# Altium PCB ACSR-RC-V2.0.PcbDoc (part 1 of 3)
Units mm, origin at the board's own origin, x right, y up, seen from the top; angles counter-clockwise.
Board outline 93 x 128 mm, 2 copper layers (Top Layer, Bottom Layer); 207 components, 178 nets, 884 pads, 664 vias.
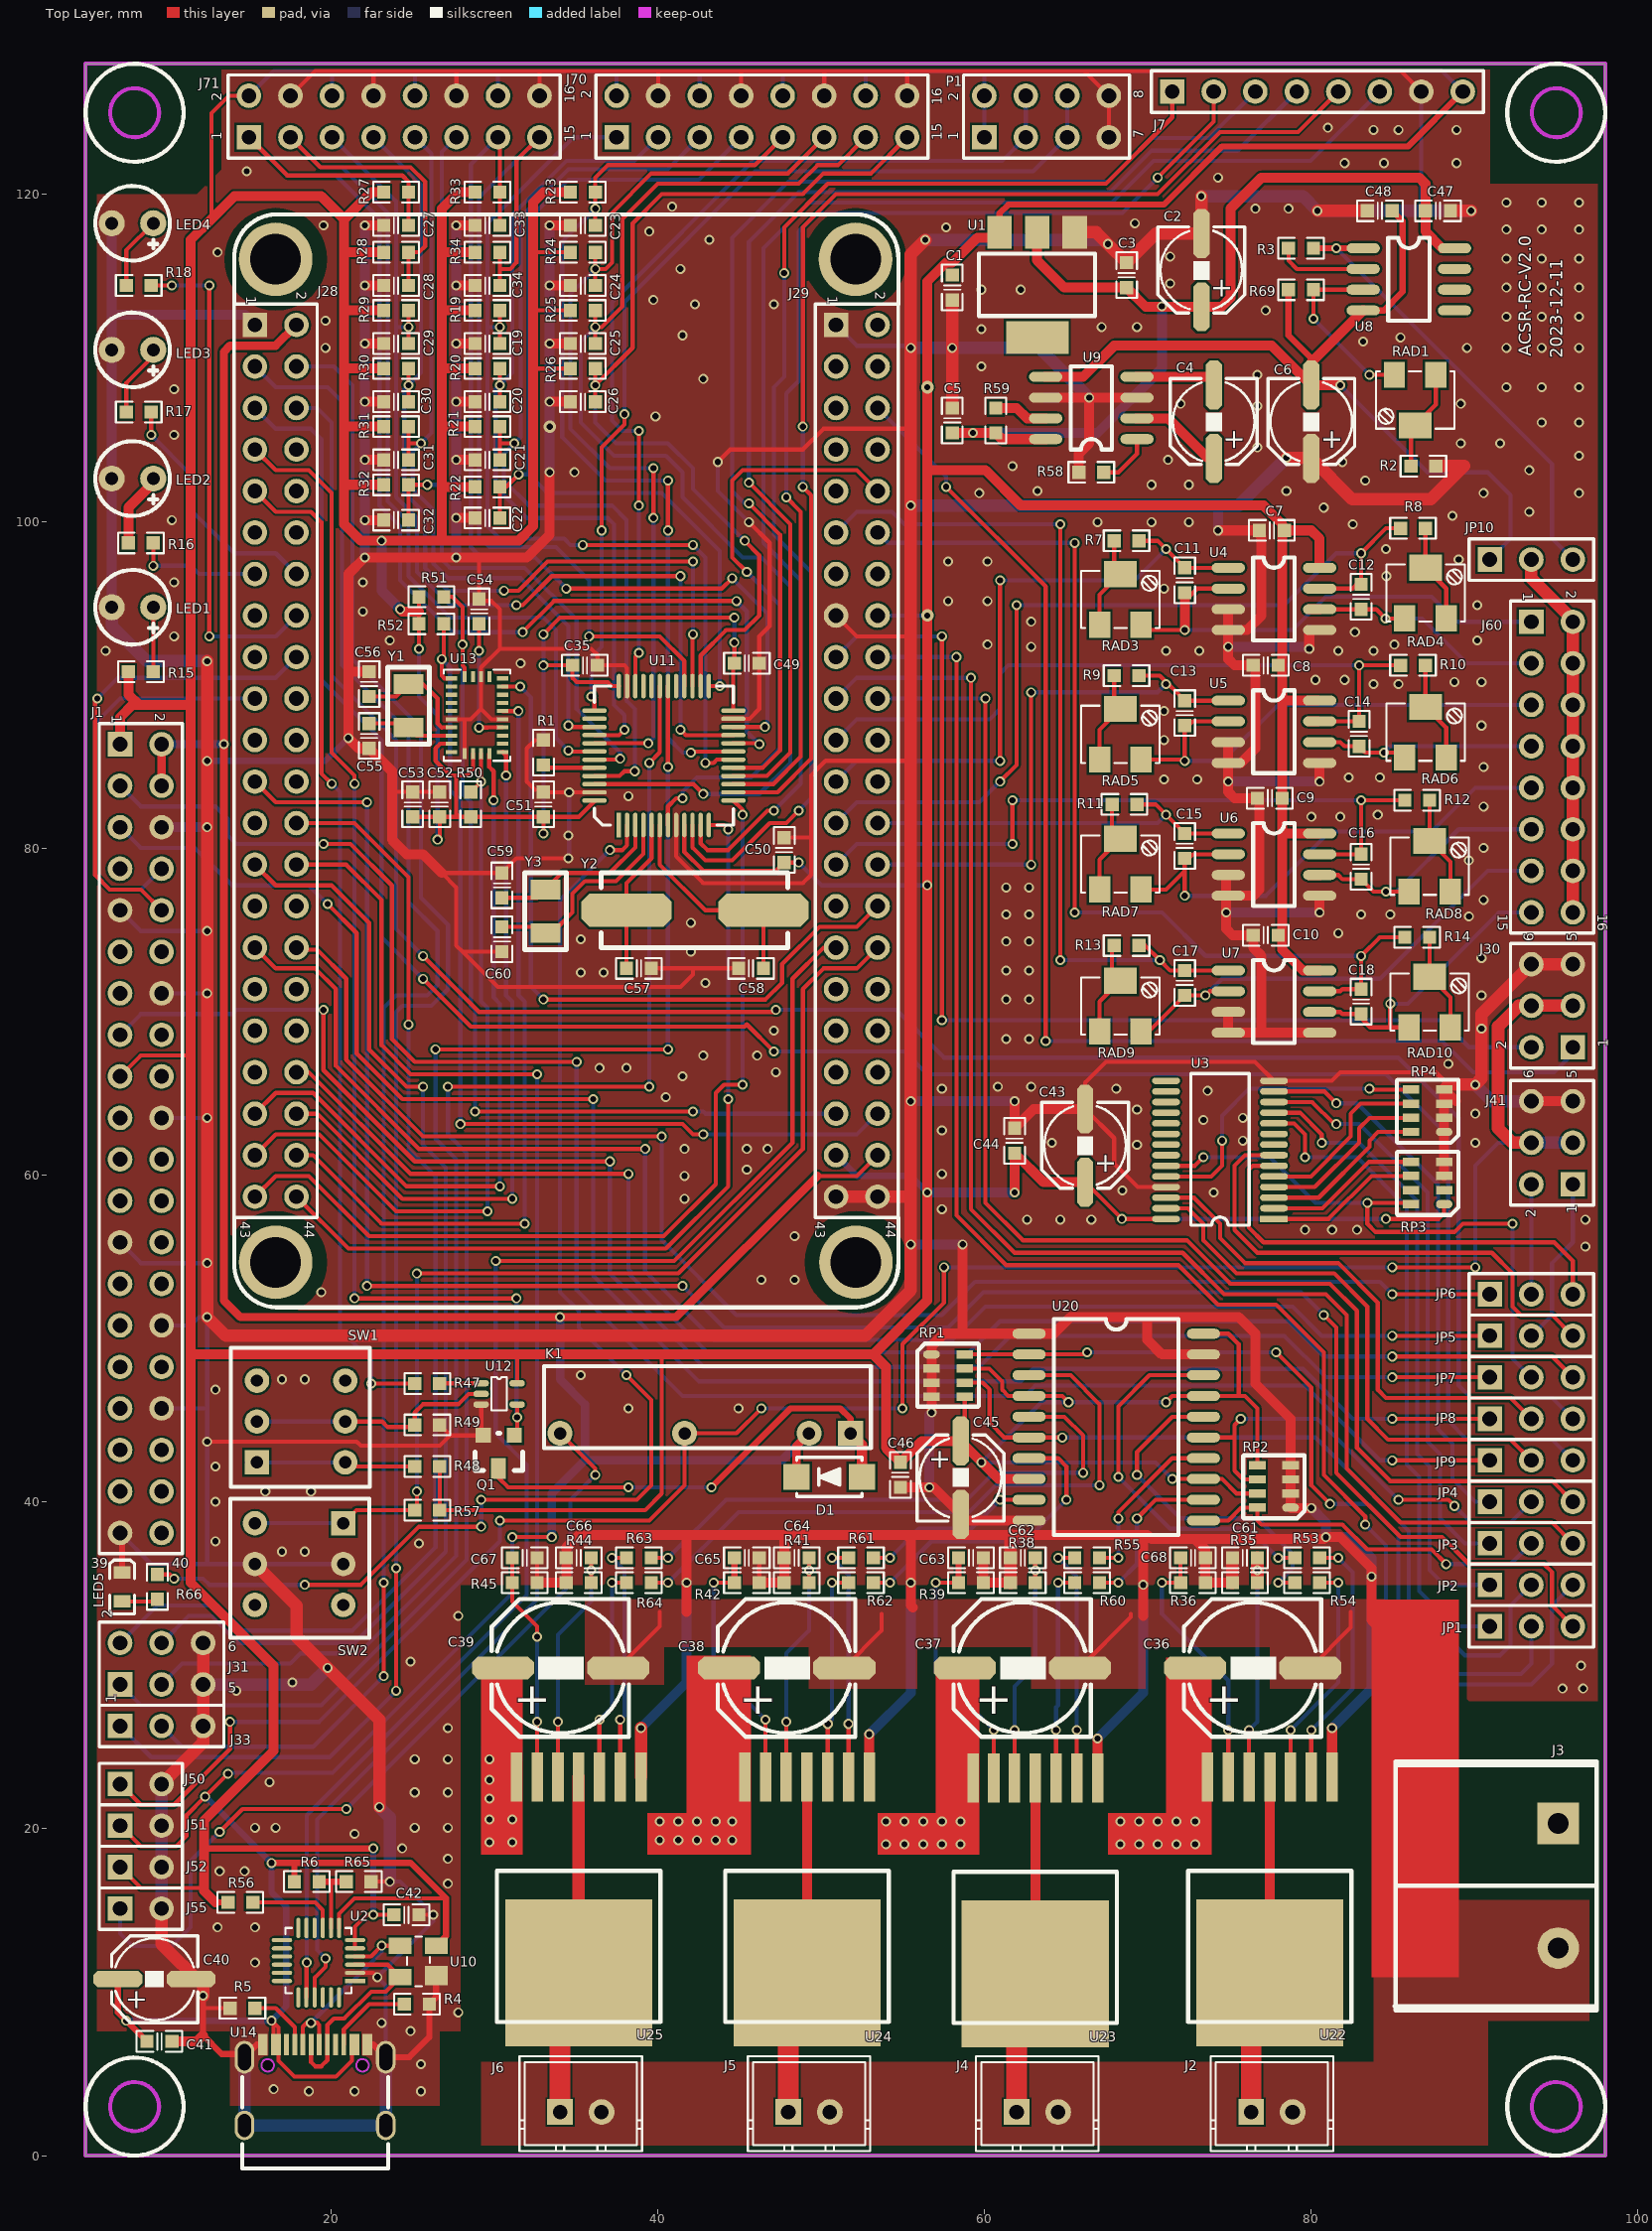
[diagram p0: Top Layer view]
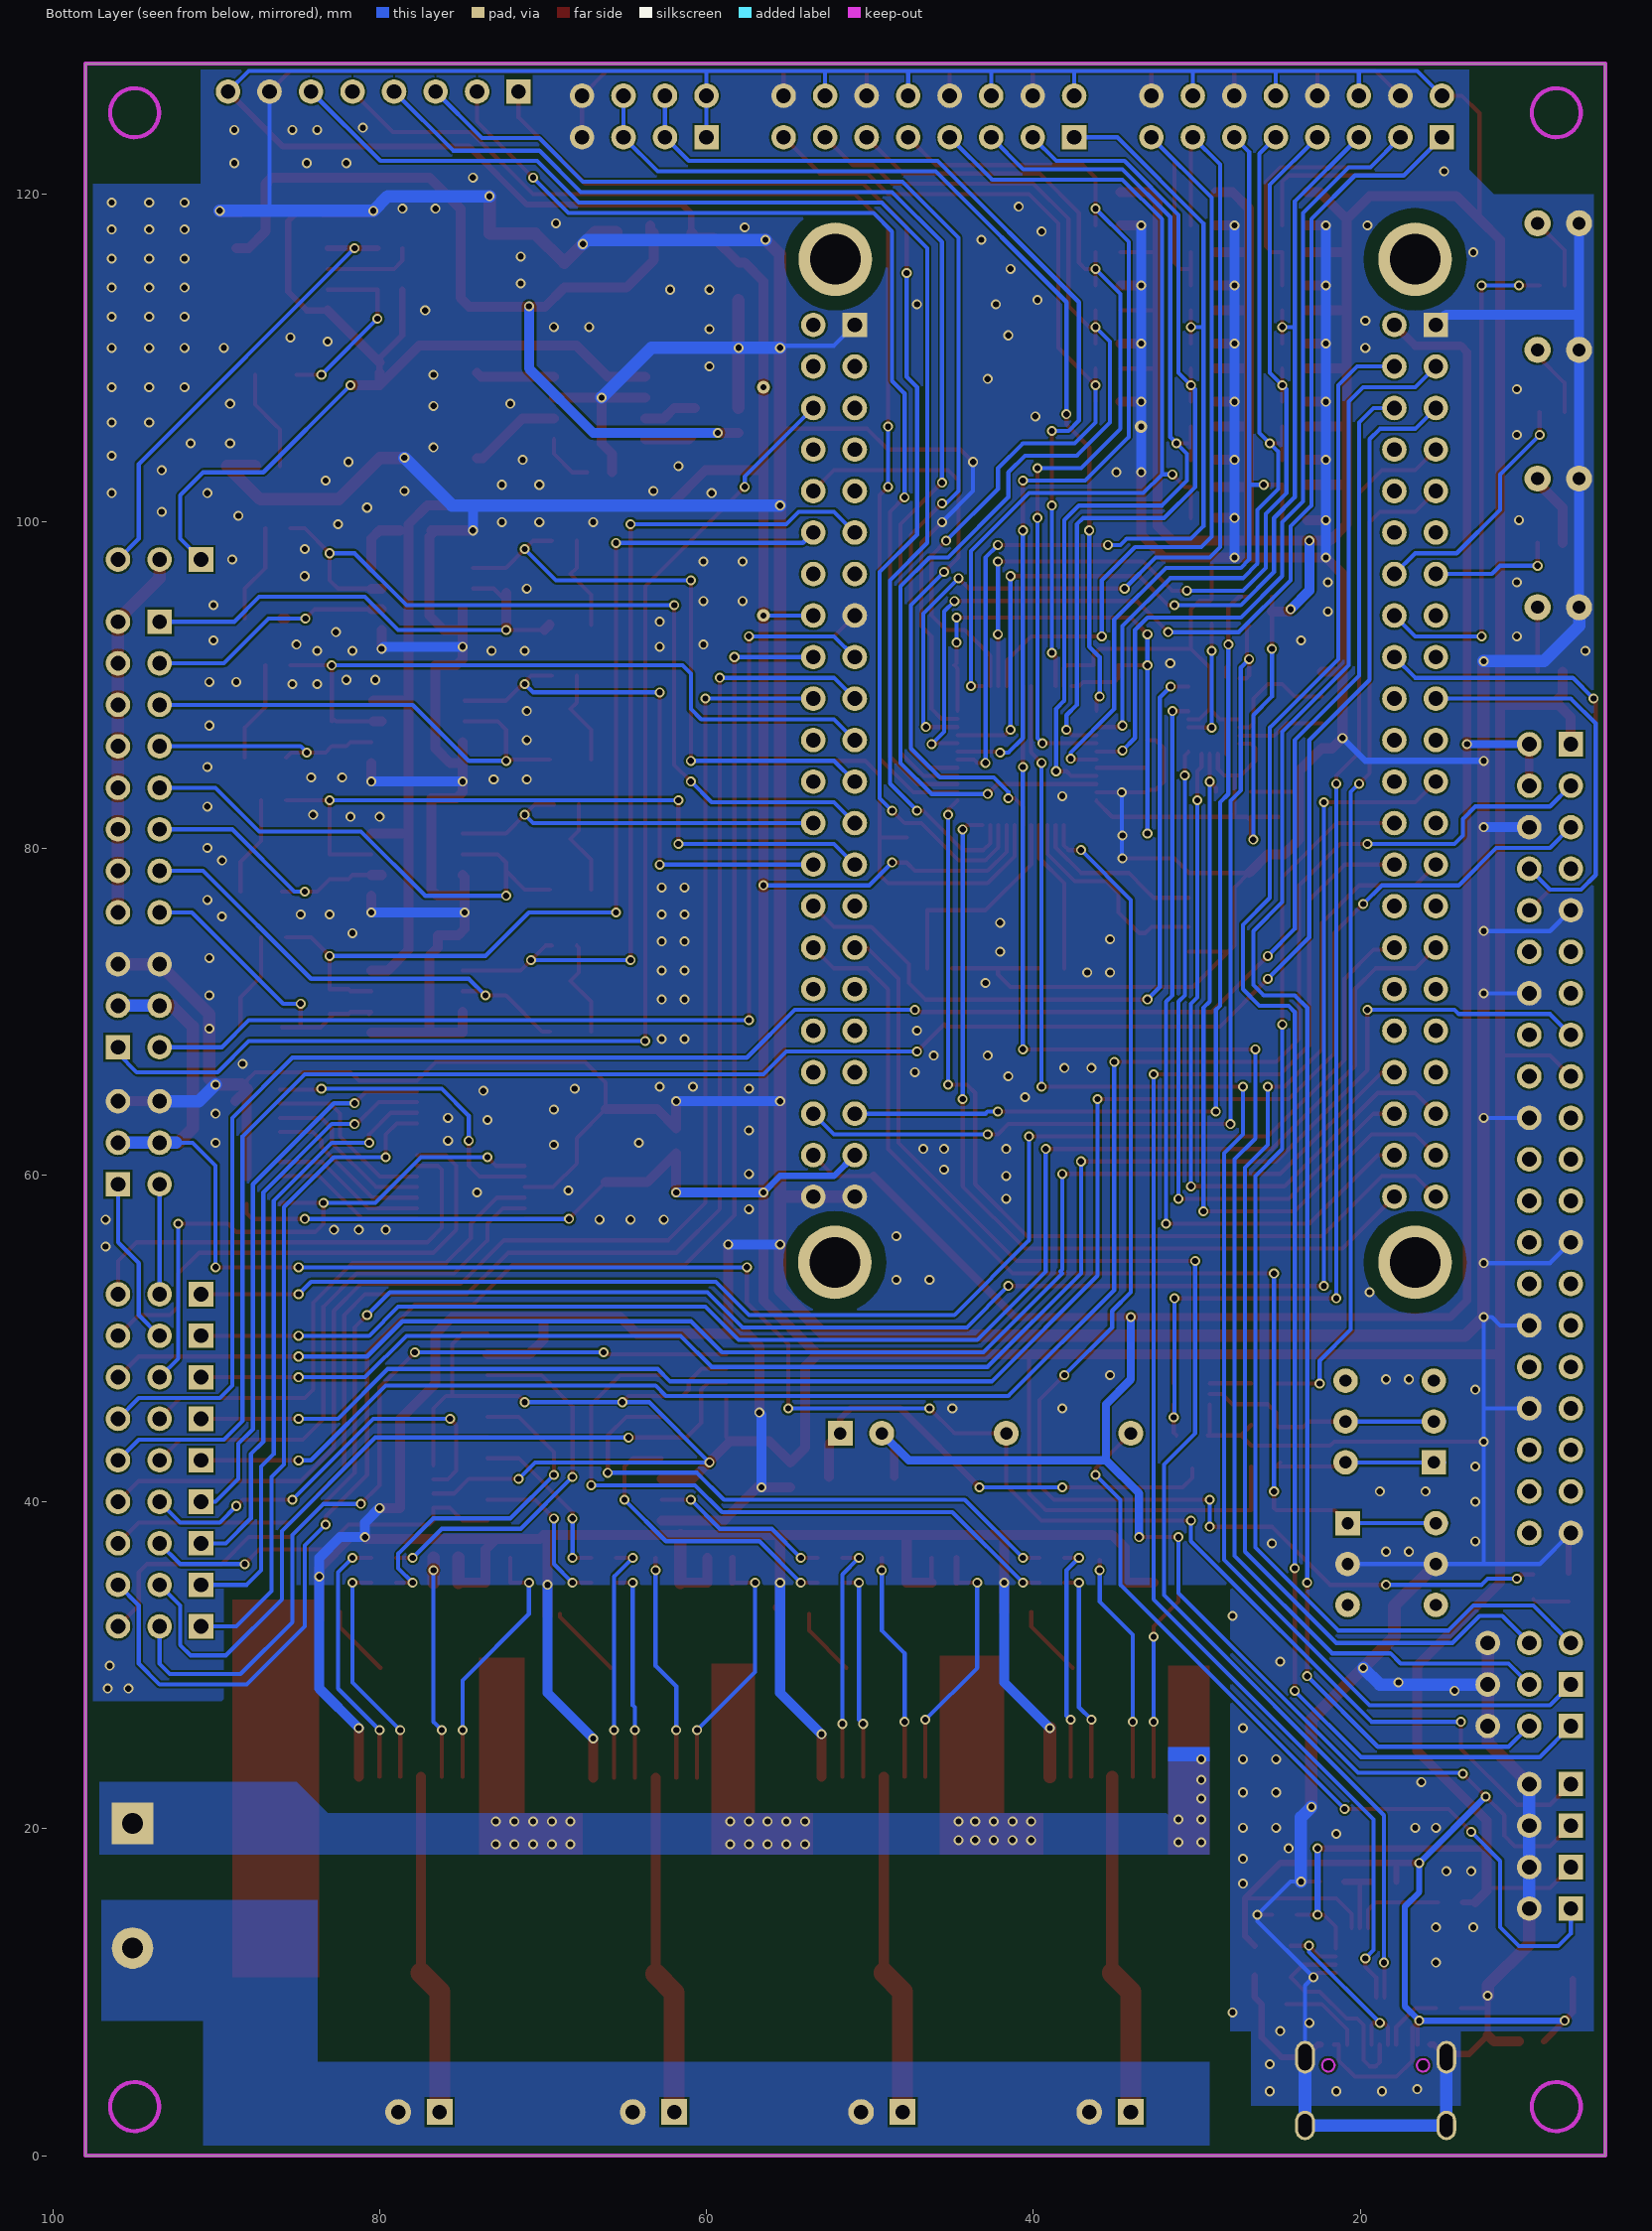
[diagram p1: Bottom Layer view, seen from below]

## Layer stack, top to bottom
Top Solder: solder mask 0.0102, Solder Resist, Dk 3.5
Top Layer: signal copper 0.0356
Dielectric 1: dielectric 0.32, FR-4, Dk 4.8
Bottom Layer: signal copper 0.0356
Bottom Solder: solder mask 0.0102, Solder Resist, Dk 3.5

## Board outline
5,0 5,128 98,128 98,0

## Design rules (kind name [scope] priority, off if disabled: settings)
Clearance Clearance_1 [InNet('GND2')] p1: gap=0.254
Clearance [All] p2: gap=0.127
ComponentClearance [All] p1 off: gap=0.254 collisioncheckmode=3 verticalgap=0.254 showdistances=FALSE
PlaneConnect [All] p1: planeconnectstyle=Direct reliefexpansion=0.508 reliefentries=4 reliefconductorwidth=0.254 reliefairgap=0.254
PolygonConnect [All] p1: connectstyle=Direct reliefconductorwidth=0.254 reliefentries=4 polygonreliefangle="90 Angle" airgapwidth=0.254
RoutingVias [All] p1: holewidth=0.381 width=0.762 viastyle="Through Hole" minholewidth=0.381 minwidth=0.61 maxholewidth=0.762 maxwidth=1.27
SolderMaskExpansion [All] p1: expansion=0.076
Width [All] p1: maxlimit=5.08 minlimit=0.254 preferedwidth=0.381
28 further rules are at their usual default settings.

## Classes and differential pairs
component class 电原理图: C1 C2 C3 C4 C5 C6 C7 C8 C9 C10 C11 C12 C13 C14 C15 C16 C17 C18 C19 C20 C21 C22 C23 C24 C25 C26 C27 C28 C29 C30 C31 C32 C33 C34 C47 C48 J60 J70 J71 JP10 LED1 LED2 LED3 LED4 R2 R3 R7 R8 R9 R10 R11 R12 R13 R14 R15 R16 R17 R18 R19 R20 R21 R22 R23 R24 R25 R26 R27 R28 R29 R30 R31 R32 R33 R34 R58 R59 R69 RAD1 RAD3 RAD4 RAD5 RAD6 RAD7 RAD8 RAD9 RAD10 U1 U4 U5 U6 U7 U8 U9
component class BTS7960: C36 C37 C38 C39 C45 C46 C61 C62 C63 C64 C65 C66 C67 C68 D1 J2 J3 J4 J5 J6 J55 K1 Q1 R35 R36 R38 R39 R41 R42 R44 R45 R47 R48 R49 R53 R54 R55 R60 R61 R62 R63 R64 RP1 RP2 SW1 U12 U20 U22 U23 U24 U25
component class "Arduino Nano": C35 C40 C41 C42 C43 C44 C49 C50 C51 C52 C53 C54 C55 C56 C57 C58 C59 C60 J1 J7 J28 J29 J30 J31 J33 J41 J50 J51 J52 JP1 JP2 JP3 JP4 JP5 JP6 JP7 JP8 JP9 LED5 P1 R1 R4 R5 R6 R50 R51 R52 R56 R57 R65 R66 RP3 RP4 SW2 U2 U3 U10 U11 U13 U14 Y1 Y2 Y3

## Components (designator, comment, footprint, x,y, rotation, side; value= is the part's Value field where it differs from the comment)
C1 "0603-50V-0.1uF" CC0603 58.039,113.538 r90 top
C2 "CD-50V-10uF-F5(SMD)" SMD-EC-F5 73.279,112.871 r90 top
C3 "0603-50V-0.1uF" CC0603 68.707,115.824 r270 top
C4 "CD-50V-10uF-F5(SMD)" SMD-EC-F5 74.041,103.6 r90 top
C5 "0603-50V-0.1uF" CC0603 58.039,106.934 r270 top
C6 "CD-50V-10uF-F5(SMD)" SMD-EC-F5 80.01,103.6 r90 top
C7 "0603-50V-0.1uF" CC0603 76.835,99.441 r0 top
C8 "0603-50V-0.1uF" CC0603 76.454,91.186 r0 top
C9 "0603-50V-0.1uF" CC0603 76.708,83.058 r0 top
C10 "0603-50V-0.1uF" CC0603 76.454,74.676 r0 top
C11 "0603-50V-47pF" CC0603 72.263,97.155 r270 top
C12 "0603-50V-47pF" CC0603 83.058,96.139 r270 top
C13 "0603-50V-47pF" CC0603 72.263,89.027 r270 top
C14 "0603-50V-47pF" CC0603 82.931,87.757 r270 top
C15 "0603-50V-47pF" CC0603 72.263,80.899 r270 top
C16 "0603-50V-47pF" CC0603 83.058,79.629 r270 top
C17 "0603-50V-47pF" CC0603 72.263,72.517 r270 top
C18 "0603-50V-47pF" CC0603 83.058,71.374 r270 top
C19 "0603-50V-0.1uF" CC0603 30.353,110.871 r180 top
C20 "0603-50V-0.1uF" CC0603 30.353,107.315 r180 top
C21 "0603-50V-0.1uF" CC0603 30.353,103.759 r180 top
C22 "0603-50V-0.1uF" CC0603 30.353,100.203 r180 top
C23 "0603-50V-0.1uF" CC0603 36.195,118.11 r180 top
C24 "0603-50V-0.1uF" CC0603 36.195,114.427 r180 top
C25 "0603-50V-0.1uF" CC0603 36.195,110.871 r180 top
C26 "0603-50V-0.1uF" CC0603 36.195,107.315 r180 top
C27 "0603-50V-0.1uF" CC0603 24.765,118.11 r180 top
C28 "0603-50V-0.1uF" CC0603 24.765,114.427 r180 top
C29 "0603-50V-0.1uF" CC0603 24.765,110.871 r180 top
C30 "0603-50V-0.1uF" CC0603 24.765,107.315 r180 top
C31 "0603-50V-0.1uF" CC0603 24.765,103.759 r180 top
C32 "0603-50V-0.1uF" CC0603 24.765,100.076 r180 top
C33 "0603-50V-0.1uF" CC0603 30.353,118.11 r180 top
C34 "0603-50V-0.1uF" CC0603 30.353,114.427 r180 top
C35 "0603-50V-0.1uF" CC0603 36.322,91.186 r180 top
C36 "CD-50V-220uF-F8(SMD)" SMD-EC-F8 72.898,29.845 r0 top
C37 "CD-50V-220uF-F8(SMD)" SMD-EC-F8 58.801,29.845 r0 top
C38 "CD-50V-220uF-F8(SMD)" SMD-EC-F8 44.384,29.845 r0 top
C39 "CD-50V-220uF-F8(SMD)" SMD-EC-F8 30.541,29.845 r0 top
C40 "CD-50V-4.7uF-F5(SMD)" SMD-EC-F5 6.731,10.795 r0 top
C41 "0603-50V-0.1uF" CC0603 10.287,6.985 r180 top
C42 "0603-50V-1uF" CC0603 25.4,14.732 r180 top
C43 "CD-50V-4.7uF-F5(SMD)" SMD-EC-F5 66.167,59.309 r90 top
C44 "0603-50V-0.1uF" CC0603 61.849,62.865 r270 top
C45 "CD-50V-4.7uF-F5(SMD)" SMD-EC-F5 58.547,43.974 r270 top
C46 "0603-50V-0.1uF" CC0603 54.864,40.894 r90 top
C47 "0603-50V-0.1uF" CC0603 88.519,118.999 r180 top
C48 "0603-50V-0.1uF" CC0603 83.439,118.999 r0 top
C49 "0603-50V-0.1uF" CC0603 46.228,91.313 r180 top
C50 "0603-50V-0.1uF" CC0603 47.752,80.645 r270 top
C51 "0603-50V-0.1uF" CC0603 33.02,83.439 r270 top
C52 "0603-50V-0.1uF" CC0603 26.67,83.439 r270 top
C53 "0603-50V-0.1uF" CC0603 25.019,83.439 r270 top
C54 "0603-50V-0.1uF" CC0603 29.083,93.726 r90 top
C55 "0603-50V-22pF" CC0603 22.352,87.63 r270 top
C56 "0603-50V-22pF" CC0603 22.352,89.281 r90 top
C57 "0603-50V-22pF" CC0603 38.1,72.644 r0 top
C58 "0603-50V-22pF" CC0603 46.482,72.644 r180 top
C59 "0603-50V-22pF" CC0603 30.48,76.962 r90 top
C60 "0603-50V-22pF" CC0603 30.48,75.184 r270 top
C61 "0603-50V-0.1uF" CC0603 75.184,36.576 r0 top
C62 "0603-50V-0.1uF" CC0603 61.595,36.576 r0 top
C63 "0603-50V-1nF" CC0603 59.944,36.576 r180 top
C64 "0603-50V-0.1uF" CC0603 47.752,36.576 r0 top
C65 "0603-50V-1nF" CC0603 46.228,36.576 r180 top
C66 "0603-50V-0.1uF" CC0603 34.417,36.576 r0 top
C67 "0603-50V-1nF" CC0603 32.639,36.576 r180 top
C68 "0603-50V-1nF" CC0603 73.533,36.576 r180 top
D1 "1N4007(SOD-123FL)" 1N4007 52.476,41.504 r180 top
J1 "Header 20X2" HDR2X20 7.112,86.36 r270 top
J2 "XH2.54-2P" XH2.54-2P 76.327,2.667 r0 top
J3 "DG7620-2P" DG7620-2P 95.123,20.32 r270 top
J4 "XH2.54-2P" XH2.54-2P 61.976,2.667 r0 top
J5 "XH2.54-2P" XH2.54-2P 48.006,2.667 r0 top
J6 "XH2.54-2P" XH2.54-2P 34.036,2.667 r0 top
J7 "Header 8" HDR1X8 71.501,126.294 r0 top
J28 "Header 22X2" HDR2X22 15.367,112.014 r270 top locked
J29 "Header 22X2" HDR2X22 50.927,112.014 r270 top locked
J30 "Header 3X2" HDR2X3 96.012,67.818 r90 top
J31 "Header 3X2" HDR2X3 7.112,28.829 r0 top
J33 "Header 3" HDR1X3 7.112,26.289 r0 top
J41 "Header 3X2" HDR2X3 96.012,59.436 r90 top
J50 "Header 2" HDR1X2 7.112,22.733 r0 top
J51 "Header 2" HDR1X2 7.112,20.193 r0 top
J52 "Header 2" HDR1X2 7.112,17.653 r0 top
J55 "Header 2" HDR1X2 7.112,15.113 r0 top
J60 "Header 8X2" HDR2X8 93.472,93.853 r270 top
J70 "Header 8X2" HDR2X8 37.5,123.5 r0 top locked
J71 "Header 8X2" HDR2X8 15,123.5 r0 top locked
JP1 "Jumper" HDR1X3 90.932,32.385 r0 top
JP2 "Jumper" HDR1X3 90.932,34.925 r0 top
JP3 "Jumper" HDR1X3 90.932,37.465 r0 top
JP4 "Jumper" HDR1X3 90.932,40.005 r0 top
JP5 "Jumper" HDR1X3 90.932,50.165 r0 top
JP6 "Jumper" HDR1X3 90.932,52.705 r0 top
JP7 "Jumper" HDR1X3 90.932,47.625 r0 top
JP8 "Jumper" HDR1X3 90.932,45.085 r0 top
JP9 "Jumper" HDR1X3 90.932,42.545 r0 top
JP10 "Jumper" HDR1X3 90.932,97.663 r0 top
K1 "HF49FD/005-1H11" HF49FD 51.816,44.196 r180 top
LED1 "LED-φ3(翠绿)" LED-R3 7.874,94.742 r270 top
LED2 "LED-φ3(红)" LED-R3 7.874,102.616 r270 top
LED3 "LED-φ3(黄)" LED-R3 7.874,110.49 r270 top
LED4 "LED-φ3(蓝)" LED-R3 7.874,118.237 r270 top
LED5 "0603-LED-(蓝)" LED0603 7.239,33.909 r90 top
P1 "Header 4X2" HDR2X4 60,123.5 r0 top locked
Q1 "S9013(SOT-23)" SOT23 30.226,42.037 r180 top
R1 "0603-1kΩ±1％" 0603 33.02,86.614 r270 top
R2 "0603-100kΩ±1％" 0603 87.63,103.378 r180 top
R3 "0603-220Ω±1％" 0603 78.613,116.713 r0 top
R4 "0603-5.1kΩ±1％" 0603 26.035,9.271 r180 top
R5 "0603-5.1kΩ±1％" 0603 13.843,9.017 r0 top
R6 "0603-22.1kΩ±1％" 0603 17.78,16.764 r0 top
R7 "0603-50kΩ±1％" 0603 67.945,98.806 r0 top
R8 "0603-50kΩ±1％" 0603 85.471,99.568 r0 top
R9 "0603-50kΩ±1％" 0603 67.945,90.551 r0 top
R10 "0603-50kΩ±1％" 0603 85.471,91.186 r0 top
R11 "0603-50kΩ±1％" 0603 67.818,82.677 r0 top
R12 "0603-50kΩ±1％" 0603 85.725,82.931 r0 top
R13 "0603-50kΩ±1％" 0603 67.945,74.041 r0 top
R14 "0603-50kΩ±1％" 0603 85.725,74.549 r0 top
R15 "0603-5.1kΩ±1％" 0603 9.144,90.805 r180 top
R16 "0603-5.1kΩ±1％" 0603 7.62,98.679 r0 top
R17 "0603-5.1kΩ±1％" 0603 7.493,106.68 r0 top
R18 "0603-5.1kΩ±1％" 0603 7.493,114.427 r0 top
R19 "0603-10kΩ±1％" 0603 28.829,112.903 r0 top
R20 "0603-10kΩ±1％" 0603 28.829,109.347 r0 top
R21 "0603-10kΩ±1％" 0603 28.829,105.791 r0 top
R22 "0603-10kΩ±1％" 0603 28.829,102.108 r0 top
R23 "0603-10kΩ±1％" 0603 34.671,120.142 r0 top
R24 "0603-10kΩ±1％" 0603 34.671,116.459 r0 top
R25 "0603-10kΩ±1％" 0603 34.671,112.903 r0 top
R26 "0603-10kΩ±1％" 0603 34.671,109.347 r0 top
R27 "0603-10kΩ±1％" 0603 23.241,120.142 r0 top
R28 "0603-10kΩ±1％" 0603 23.241,116.459 r0 top
R29 "0603-10kΩ±1％" 0603 23.241,112.903 r0 top
R30 "0603-10kΩ±1％" 0603 23.241,109.347 r0 top
R31 "0603-10kΩ±1％" 0603 23.241,105.791 r0 top
R32 "0603-10kΩ±1％" 0603 23.241,102.235 r0 top
R33 "0603-10kΩ±1％" 0603 28.829,120.142 r0 top
R34 "0603-10kΩ±1％" 0603 28.829,116.459 r0 top
R35 "0603-510Ω±1％" 0603 75.184,35.052 r0 top
R36 "0603-1kΩ±1％" 0603 73.533,35.052 r180 top
R38 "0603-510Ω±1％" 0603 61.595,35.052 r0 top
R39 "0603-1kΩ±1％" 0603 59.944,35.052 r180 top
R41 "0603-510Ω±1％" 0603 47.752,35.052 r0 top
R42 "0603-1kΩ±1％" 0603 46.228,35.052 r180 top
R44 "0603-510Ω±1％" 0603 34.417,35.052 r0 top
R45 "0603-1kΩ±1％" 0603 32.639,35.052 r180 top
R47 "0603-10kΩ±1％" 0603 26.67,47.244 r180 top
R48 "0603-10kΩ±1％" 0603 25.146,42.164 r0 top
R49 "0603-10kΩ±1％" 0603 25.146,44.704 r0 top
R50 "0603-10kΩ±1％" 0603 28.575,83.439 r270 top
R51 "0603-3.3kΩ±1％" 0603 26.924,95.377 r180 top
R52 "0603-3.3kΩ±1％" 0603 26.924,93.726 r180 top
R53 "0603-10kΩ±1％" 0603 78.994,36.576 r0 top
R54 "0603-10kΩ±1％" 0603 78.994,35.052 r0 top
R55 "0603-10kΩ±1％" 0603 67.056,36.576 r180 top
R56 "0603-4.7kΩ±1％" 0603 13.716,15.494 r0 top
R57 "0603-4.7kΩ±1％" 0603 26.67,39.497 r180 top
R58 "0603-0Ω±1％" 0603 65.786,102.997 r0 top
R59 "0603-0Ω±1％" 0603 60.706,106.934 r270 top
R60 "0603-10kΩ±1％" 0603 67.056,35.052 r180 top
R61 "0603-10kΩ±1％" 0603 53.213,36.576 r180 top
R62 "0603-10kΩ±1％" 0603 53.213,35.052 r180 top
R63 "0603-10kΩ±1％" 0603 39.624,36.576 r180 top
R64 "0603-10kΩ±1％" 0603 39.624,35.052 r180 top
R65 "0603-47.5kΩ±1％" 0603 20.955,16.764 r0 top
R66 "0603-10kΩ±1％" 0603 9.398,34.036 r90 top
R69 "0603-100kΩ±1％" 0603 80.137,114.173 r180 top
RAD1 "3224W-50k" 3224W 87.63,108.966 r270 top
RAD3 "3224W-100k" 3224W 67.056,93.674 r90 top
RAD4 "3224W-100k" 3224W 85.725,94.055 r90 top
RAD5 "3224W-100k" 3224W 67.056,85.419 r90 top
RAD6 "3224W-100k" 3224W 85.725,85.546 r90 top
RAD7 "3224W-100k" 3224W 67.056,77.47 r90 top
RAD8 "3224W-100k" 3224W 85.979,77.343 r90 top
RAD9 "3224W-100k" 3224W 67.056,68.782 r90 top
RAD10 "3224W-100k" 3224W 85.979,69.036 r90 top
RP1 "0603-1kΩ-2*4P" RP8F 56.769,49.022 r0 top
RP2 "0603-1kΩ-2*4P" RP8F 78.74,39.649 r180 top
RP3 "0603-10kΩ-2*4P" RP8F 88.138,58.217 r180 top
RP4 "0603-10kΩ-2*4P" RP8F 88.138,62.636 r180 top
SW1 "XKB8585-Z-150" KEY_SWITCH 15.494,42.418 r90 top
SW2 "XKB8585-Z-150" KEY_SWITCH 20.767,38.695 r270 top
U1 "LM1117GS-1.2" SOT223 65.529,117.692 r180 top
U2 "CP2102N-A02-GQFN24R" QFN24 21.268,10.684 r180 top
U3 "PCA9685" TSSOP-28 77.724,57.314 r180 top
U4 "MCP6002" SO-8 74.93,97.155 r0 top
U5 "MCP6002" SO-8 74.93,89.027 r0 top
U6 "MCP6002" SO-8 74.93,80.899 r0 top
U7 "MCP6002" SO-8 74.93,72.517 r0 top
U8 "MCP6002" SO-8 83.185,116.713 r0 top
U9 "max860" SO-8 69.342,105.029 r180 top
U10 "SP0503BAHTG" SOT143-4 26.457,11.022 r90 top
U11 "STM32F103C8T6" LQFP48 37.64,81.416 r0 top locked
U12 "SN74LVC1G32QDCKRQ1" SC70-5 29.21,47.259 r0 top
U13 "BNO085" LGA28 28.956,88.138 r180 top
U14 "TYPE-C-31-M-12" USB-C_SMD-TYPE-C-31-M-12 19.05,4.318 r0 top
U20 "SN74AHC244DW" SOP-20 62.738,50.292 r0 top
U22 "BTN8962" BTN7970 81.28,23.176 r180 top
U23 "BTN8962" BTN7970 66.929,23.114 r180 top
U24 "BTN8962" BTN7970 52.959,23.176 r180 top locked
U25 "BTN8962" BTN7970 38.989,23.176 r180 top
Y1 "32.768k" XTAL-FA135 24.765,90.043 r0 top
Y2 "25M" XT49M 46.482,76.2 r180 top
Y3 "32.768k" XTAL-FA135 33.147,74.803 r180 top

## Footprints (in the part's own frame and the unit in brackets; to place one, negate y for a bottom-side part, rotate by r counter-clockwise, add the part's x,y. Pads: shape width x height; smd on the part's side, far side on the other; paste and mask are expansions set on the pad)
1N4007 [mm]
  rect 1.6x1.6 smd: 1(-0.038,-0.025) 2(3.962,-0.025)
  silkscreen extent -0.04,-1.23 3.96,1.17
0603 [mil]
  rect 31.73x31.73 smd: 1(0,0) 2(60,0)
  silkscreen extent -25,-25 85,25
3224W [mm]
  rect 1.6x1.3 smd: 1(0,0) 3(0,-2.54)
  rect 1.6x2 smd: 2(3.1,-1.27)
  silkscreen extent -0.2,-3.67 3.3,1.13
BTN7970 [mm]
  rect 0.7x3 smd: 1(0,0) 2(1.27,0) 3(2.54,0) 4(3.81,0) 5(5.08,0) 6(6.35,0) 7(7.62,0)
  rect 9x9 smd: 8(3.81,12)
  silkscreen extent -1.19,5.75 8.81,15
CC0603 [mm]
  rect 0.805x0.805 smd: 1(0,0) 2(1.524,0)
  silkscreen extent -0.64,-0.64 2.16,0.64
DG7620-2P [mm]
  rect 2.54x2.54 hole 1.27: 1(0,0)
  round 2.54 hole 1.27: 2(7.62,0)
  silkscreen extent -3.81,-10.01 11.43,2.35
HDR1X2 [mm] "Connector; Header; 2 Position"
  rect 1.5x1.5 hole 0.9: 1(0,0)
  round 1.5 hole 0.9: 2(2.54,0)
  silkscreen extent -1.27,-1.27 3.81,1.27
HDR1X3 [mm] "Connector; Header; 3 Position"
  rect 1.5x1.5 hole 0.9: 1(0,0)
  round 1.5 hole 0.9: 2(2.54,0) 3(5.08,0)
  silkscreen extent -1.27,-1.27 6.35,1.27
HDR1X8 [mm] "Connector; Header; 8 Position"
  rect 1.5x1.5 hole 0.9: 1(0,0)
  round 1.5 hole 0.9: 2(2.54,0) 3(5.08,0) 4(7.62,0) 5(10.16,0) 6(12.7,0) 7(15.24,0) 8(17.78,0)
  silkscreen extent -1.27,-1.27 19.05,1.27
HDR2X3 [mm] "Connector; Header; 3x2 Position"
  rect 1.5x1.5 hole 0.9: 1(0,0)
  round 1.5 hole 0.9: 2(0,2.54) 3(2.54,0) 4(2.54,2.54) 5(5.08,0) 6(5.08,2.54)
  silkscreen extent -1.27,-1.27 6.35,3.81
HDR2X4 [mm] "Connector; Header; 4x2 Position"
  rect 1.5x1.5 hole 0.9: 1(0,0)
  round 1.5 hole 0.9: 2(0,2.54) 3(2.54,0) 4(2.54,2.54) 5(5.08,0) 6(5.08,2.54) 7(7.62,0) 8(7.62,2.54)
  silkscreen extent -1.27,-1.27 8.89,3.81
HDR2X8 [mm] "Connector; Header; 8x2 Position"
  rect 1.5x1.5 hole 0.9: 1(0,0)
  round 1.5 hole 0.9: 2(0,2.54) 3(2.54,0) 4(2.54,2.54) 5(5.08,0) 6(5.08,2.54) 7(7.62,0) 8(7.62,2.54) 9(10.16,0) 10(10.16,2.54) 11(12.7,0) 12(12.7,2.54) 13(15.24,0) 14(15.24,2.54) 15(17.78,0) 16(17.78,2.54)
  silkscreen extent -1.27,-1.27 19.05,3.81
HDR2X20 [mm] "Connector; Header; 20x2 Position"
  rect 1.5x1.5 hole 0.9: 1(0,0)
  round 1.5 hole 0.9: 2(0,2.54) 3(2.54,0) 4(2.54,2.54) 5(5.08,0) 6(5.08,2.54) 7(7.62,0) 8(7.62,2.54) 9(10.16,0) 10(10.16,2.54) 11(12.7,0) 12(12.7,2.54) 13(15.24,0) 14(15.24,2.54) 15(17.78,0) 16(17.78,2.54) 17(20.32,0) 18(20.32,2.54) 19(22.86,0) 20(22.86,2.54) 21(25.4,0) 22(25.4,2.54) 23(27.94,0) 24(27.94,2.54) 25(30.48,0) 26(30.48,2.54) 27(33.02,0) 28(33.02,2.54) 29(35.56,0) 30(35.56,2.54) 31(38.1,0) 32(38.1,2.54) 33(40.64,0) 34(40.64,2.54) 35(43.18,0) 36(43.18,2.54) 37(45.72,0) 38(45.72,2.54) 39(48.26,0) 40(48.26,2.54)
  silkscreen extent -1.27,-1.27 49.53,3.81
HDR2X22 [mm] "Connector; Header; 22x2 Position"
  rect 1.5x1.5 hole 0.9: 1(0,0)
  round 1.5 hole 0.9: 2(0,2.54) 3(2.54,0) 4(2.54,2.54) 5(5.08,0) 6(5.08,2.54) 7(7.62,0) 8(7.62,2.54) 9(10.16,0) 10(10.16,2.54) 11(12.7,0) 12(12.7,2.54) 13(15.24,0) 14(15.24,2.54) 15(17.78,0) 16(17.78,2.54) 17(20.32,0) 18(20.32,2.54) 19(22.86,0) 20(22.86,2.54) 21(25.4,0) 22(25.4,2.54) 23(27.94,0) 24(27.94,2.54) 25(30.48,0) 26(30.48,2.54) 27(33.02,0) 28(33.02,2.54) 29(35.56,0) 30(35.56,2.54) 31(38.1,0) 32(38.1,2.54) 33(40.64,0) 34(40.64,2.54) 35(43.18,0) 36(43.18,2.54) 37(45.72,0) 38(45.72,2.54) 39(48.26,0) 40(48.26,2.54) 41(50.8,0) 42(50.8,2.54) 43(53.34,0) 44(53.34,2.54)
  silkscreen extent -1.27,-1.27 54.61,3.81
HF49FD [mil]
  rect 60x60 hole 30: 1(0,0)
  round 60 hole 30: 2(100,0) 3(400,0) 4(700,0)
  silkscreen extent -49,-161 738,35
KEY_SWITCH [mm]
  rect 1.5x1.5 hole 0.75: 1(0,0)
  round 1.5 hole 0.75: 2(2.5,0) 3(5,0) 4(5,-5.4) 5(2.5,-5.4) 6(0,-5.4)
  silkscreen extent -1.5,-6.9 7,1.6
LED0603 [mil]
  rect 30x40 smd: 1(0,0) 2(70,0)
  silkscreen extent -30,-30 100,30
LED-R3 [mm] "Typical RED GaAs LED; 2 Leads"
  round 1.6 hole 0.8: 1(0,1.27) 2(0,-1.27)
  silkscreen extent -2.29,-2.28 2.29,2.29
LGA28 [mm]
  rect 0.675x0.25 smd: 1(1.562,2.25) 6(-1.562,2.25) 7(-1.562,1.75) 8(-1.562,1.25) 9(-1.562,0.75) 10(-1.562,0.25) 11(-1.562,-0.25) 12(-1.562,-0.75) 13(-1.562,-1.25) 14(-1.562,-1.75) 15(-1.562,-2.25) 20(1.562,-2.25) 21(1.562,-1.75) 22(1.562,-1.25) 23(1.562,-0.75) 24(1.562,-0.25) 25(1.562,0.25) 26(1.562,0.75) 27(1.562,1.25) 28(1.562,1.75)
  rect 0.25x0.675 smd: 2(0.75,2.362) 3(0.25,2.362) 4(-0.25,2.362) 5(-0.75,2.362) 16(-0.75,-2.362) 17(-0.25,-2.362) 18(0.25,-2.362) 19(0.75,-2.362)
  silkscreen extent -2.03,-2.79 2.03,2.79
LQFP48 [mm]
  rect 0.27x1.5 smd: 1(0,0)
  oval 0.27x1.5 smd: 2(0.5,0) 3(1,0) 4(1.5,0) 5(2,0) 6(2.5,0) 7(3,0) 8(3.5,0) 9(4,0) 10(4.5,0) 11(5,0) 12(5.5,0) 25(5.5,8.5) 26(5,8.5) 27(4.5,8.5) 28(4,8.5) 29(3.5,8.5) 30(3,8.5) 31(2.5,8.5) 32(2,8.5) 33(1.5,8.5) 34(1,8.5) 35(0.5,8.5) 36(0,8.5)
  oval 1.5x0.27 smd: 13(7,1.5) 14(7,2) 15(7,2.5) 16(7,3) 17(7,3.5) 18(7,4) 19(7,4.5) 20(7,5) 21(7,5.5) 22(7,6) 23(7,6.5) 24(7,7) 37(-1.5,7) 38(-1.5,6.5) 39(-1.5,6) 40(-1.5,5.5) 41(-1.5,5) 42(-1.5,4.5) 43(-1.5,4) 44(-1.5,3.5) 45(-1.5,3) 46(-1.5,2.5) 47(-1.5,2) 48(-1.5,1.5)
  silkscreen extent -1.5,0 7,8.5
QFN24 [mm]
  rect 1.25x0.25 smd: 1(-0.225,0)
  oval 1.25x0.25 smd: 2(-0.225,-0.5) 3(-0.225,-1) 4(-0.225,-1.5) 5(-0.225,-2) 6(-0.225,-2.5) 13(4.25,-2.5) 14(4.25,-2) 15(4.25,-1.5) 16(4.25,-1) 17(4.25,-0.5) 18(4.25,0)
  oval 0.25x1.25 smd: 7(0.75,-3.25) 8(1.25,-3.25) 9(1.75,-3.25) 10(2.25,-3.25) 11(2.75,-3.25) 12(3.25,-3.25) 19(3.25,1) 20(2.75,1) 21(2.25,1) 22(1.75,1) 23(1.25,1) 24(0.75,1)
  silkscreen extent 0,-3.25 4.02,0.75
RP8F [mil]
  oval 40x20 smd: 1(0,0)
  rect 40x20 smd: 2(0,-34) 3(0,-68) 4(0,-102) 5(80,-102) 6(80,-68) 7(80,-34) 8(80,0)
  silkscreen extent -34,-126 114,26
SC70-5 [mm]
  oval 0.95x0.4 smd: 1(0,0) 2(0,-0.65) 3(0,-1.3) 4(2.2,-1.3) 5(2.2,0)
  silkscreen extent 0.64,-1.65 1.57,0.38
SMD-EC-F5 [mm]
  oct 3x1 smd: 1(0.254,0) 2(4.731,0)
  silkscreen extent -0.13,-2.66 5.15,2.66
SMD-EC-F8 [mm]
  oct 3.8x1.4 smd: 1(0,0) 2(7.051,0)
  silkscreen extent -0.69,-4.22 7.71,4.22
SO-8 [mil]
  oval 80x24 smd: 1(0,0) 2(0,-50) 3(0,-100) 4(0,-150) 5(220,-150) 6(220,-100) 7(220,-50) 8(220,0)
  silkscreen extent 60,-175 160,25
SOP-20 [mil]
  oval 80x24 smd: 1(0,0) 2(0,-50) 3(0,-100) 4(0,-150) 5(0,-200) 6(0,-250) 7(0,-300) 8(0,-350) 9(0,-400) 10(0,-450) 11(420,-450) 12(420,-400) 13(420,-350) 14(420,-300) 15(420,-250) 16(420,-200) 17(420,-150) 18(420,-100) 19(420,-50) 20(420,0)
  silkscreen extent 60,-485 360,35
SOT23 [mil]
  rect 36x36 smd: 1(-40,-80) 2(35,-80)
  rect 36x50 smd: 3(-2,0)
  silkscreen extent -60,-85 55,5
SOT143-4 [mm]
  rect 1.2x1.4 smd: 1(0,0)
  rect 1x1.4 smd: 2(1.82,0) 3(1.82,2.2) 4(-0.1,2.2)
  silkscreen extent -0.66,0.38 2.38,1.78
SOT223 [mil]
  rect 59x79 smd: 1(0,0) 2(90.55,0) 3(181.1,0)
  rect 150x79 smd: 4(89.88,253.54)
  silkscreen extent -49,52 231,202
TSSOP-28 [mm]
  rect 1.7x0.4 smd: 1(0,0)
  oval 1.7x0.4 smd: 2(0,-0.65) 3(0,-1.3) 4(0,-1.95) 5(0,-2.6) 6(0,-3.25) 7(0,-3.9) 8(0,-4.55) 9(0,-5.2) 10(0,-5.85) 11(0,-6.5) 12(0,-7.15) 13(0,-7.8) 14(0,-8.45) 15(6.604,-8.45) 16(6.604,-7.8) 17(6.604,-7.15) 18(6.604,-6.5) 19(6.604,-5.85) 20(6.604,-5.2) 21(6.604,-4.55) 22(6.604,-3.9) 23(6.604,-3.25) 24(6.604,-2.6) 25(6.604,-1.95) 26(6.604,-1.3) 27(6.604,-0.65) 28(6.604,0)
  silkscreen extent 1.52,-8.89 5.08,0.38
USB-C_SMD-TYPE-C-31-M-12 [mm]
  oval 1.2x2 hole 0.8 slot 1.6 at 90 deg: 0(-4.325,1.706) 1(4.325,1.706)
  oval 1.2x1.8 hole 0.8 slot 1.4 at 90 deg: 2(4.325,-2.474) 3(-4.325,-2.474)
  rect 0.3x1.3 smd paste-100 mask+0.051: A1(-3.35,2.474) A4(-2.55,2.474) A5(-1.25,2.474) A6(-0.25,2.474) A7(0.25,2.474) A8(1.25,2.474) A9(2.55,2.474) A12(3.35,2.474) B1(3.05,2.474) B4(2.25,2.474) B5(1.75,2.474) B6(0.75,2.474) B7(-0.75,2.474) B8(-1.75,2.474) B9(-2.25,2.474) B12(-3.05,2.474)
  Keep-Out Layer board cut-out: 3.275,1.206 3.275,1.28 3.218,1.418 3.112,1.524 2.975,1.581 2.825,1.581 2.687,1.524 2.582,1.418 2.525,1.28 2.525,1.206 2.525,1.131 2.582,0.993 2.687,0.888 2.825,0.831 2.975,0.831 3.112,0.888 3.218,0.993 3.275,1.131 3.275,1.206 3.275,1.206
  Keep-Out Layer board cut-out: -2.525,1.206 -2.525,1.28 -2.582,1.418 -2.687,1.524 -2.825,1.581 -2.975,1.581 -3.112,1.524 -3.218,1.418 -3.275,1.28 -3.275,1.206 -3.275,1.131 -3.218,0.993 -3.112,0.888 -2.975,0.831 -2.825,0.831 -2.687,0.888 -2.582,0.993 -2.525,1.131 -2.525,1.206 -2.525,1.206
  Multi-Layer pour cut-out: 3.275,1.206 3.275,1.28 3.218,1.418 3.112,1.524 2.975,1.581 2.825,1.581 2.687,1.524 2.582,1.418 2.525,1.28 2.525,1.206 2.525,1.131 2.582,0.993 2.687,0.888 2.825,0.831 2.975,0.831 3.112,0.888 3.218,0.993 3.275,1.131 3.275,1.206 3.275,1.206
  Multi-Layer pour cut-out: -2.525,1.206 -2.525,1.28 -2.582,1.418 -2.687,1.524 -2.825,1.581 -2.975,1.581 -3.112,1.524 -3.218,1.418 -3.275,1.28 -3.275,1.206 -3.275,1.131 -3.218,0.993 -3.112,0.888 -2.975,0.831 -2.825,0.831 -2.687,0.888 -2.582,0.993 -2.525,1.131 -2.525,1.206 -2.525,1.206
  silkscreen extent -4.47,-5.09 4.47,0.49
XH2.54-2P [mil]
  rect 62x62 hole 35: 1(0,0)
  round 62 hole 35: 2(100,0)
  silkscreen extent -98,-94 198,134
XT49M [mm]
  oct 5.55x2.05 smd: 1(0,0) 2(8.382,0)
  silkscreen extent -1.5,-2.3 9.93,2.3
XTAL-FA135 [mm]
  rect 1.8x1.2 smd: 1(0,0) 2(0,-2.667)
  silkscreen extent -1.27,-3.68 1.27,1.02

## Part data
C1 C3 C5 C35 C41 C42 C44 C46 C49 C50 C51 C52 C53 C54 C55 C56 C57 C58 C59 C60 C61 C62 C63 C64 C65 C66 C67 C68: library part Cap, "贴片电容"
C2 C4 C6 C40 C43 C45: library part "Cap Pol1", "贴片铝电解电容"
C7 C8 C9 C10 C11 C12 C13 C14 C15 C16 C17 C18 C19 C20 C21 C22 C23 C24 C25 C26 C27 C28 C29 C30 C31 C32 C33 C34 C47 C48: library part CAP, "贴片电容"
C36 C37 C38 C39: library part "Cap Pol3", "贴片铝电解电容"
D1: library part Diode, "贴片二极管"
J1 J7 J28 J29 J30 J31 J33 J41 J60 J70 J71 P1: "排针"
J2 J3 J4 J5 J6: library part CON2, "插座"
J50 J51 J52 J55: library part CON2, "排针"
JP1 JP2 JP3 JP4 JP5 JP6 JP7 JP8 JP9 JP10: library part Bell
K1: library part Relay-SPST, "Single-Pole Single-Throw Relay"
LED1 LED2 LED3 LED4 LED5: library part LED, "发光二极管"
Q1: library part S9013, "贴片三极管"
R1 R2 R3 R4 R5 R6 R7 R8 R9 R10 R11 R12 R13 R14 R19 R20 R21 R22 R23 R24 R25 R26 R27 R28 R29 R30 R31 R32 R33 R34 R35 R36 R38 R39 R41 R42 R44 R45 R47 R48 R49 R50 R51 R52 R53 R54 R55 R56 R57 R58 R59 R60 R61 R62 R63 R64 R65 R66 R69: library part Res2, "贴片电阻"
R15 R16 R17 R18: library part Res2, "贴片电阻器"
RAD1 RAD3 RAD4 RAD5 RAD6 RAD7 RAD8 RAD9 RAD10: library part "RPot SM", "贴片电位器"
RP1 RP2 RP3 RP4: library part RESPACK, "排阻"
SW1 SW2: library part SW-SPST, "开关"
U1: library part 78, "三端稳压器"
U2 U3 U9 U10 U11 U20: "集成电路"
U4 U5 U6 U7 U8: library part 1458, "集成电路"
U12: library part 74LS32, "集成电路"
U13: library part BNO080, "集成电路"
U22 U23 U24 U25: library part BTN7970, "集成电路"
Y1 Y2 Y3: library part XTAL, "Crystal Oscillator"

## Free pads (board coordinates)
  round 4.5 hole 3.1: ""(16.637,54.654) ""(16.637,116.034) ""(52.121,116.034) ""(52.146,54.654)

## Via types
v1: diameter 0.61, hole 0.381, Top Layer to Bottom Layer, 661 vias
v2: diameter 0.762, hole 0.381, Top Layer to Bottom Layer, 3 vias

## Nets (pads, with @x,y where several pads share a name; then routed paths per layer and width w, separated by ;. In a path a pad name is that pad's centre, name@x,y a point inside that pad or via, vN(x,y) a via of type N, cw(c..) or ccw(c..) an arc to the next point about the centre after c; other vN are vias at no path point)
+1.2V: C2.1 C3.2 C5.2 C47.2 R59.2 U1.2 U8.8 U9.8 | length 61.7
  Top Layer w0.61: C5.2@58.039,105.41 v1(59.309,105.41) R59.2@60.706,105.41 61.087,105.029 U9.8@63.754,105.029 ; U1.2@63.229,117.692 63.229,115.968 64.897,114.3 C3.2@68.707,114.3 69.882,113.125 C2.1@73.279,113.125 74.517,113.125 75.057,113.665 75.057,119.126 76.962,121.031 86.614,121.031 86.995,120.65 C47.2@86.995,118.999 86.995,117.729 88.011,116.713 U8.8@88.773,116.713 ; U1.2@63.436,117.692 U1.2@63.436,118.11
  Bottom Layer w0.61: v1(59.309,105.41) 66.929,105.41 70.866,109.347 v1(70.866,113.157)
+3.3V: C1.2 C7.2 C8.2 C9.2 C10.2 C35.2 C42.2 C43.1 C44.2 C45.1 C46.2 C49.2 C50.2 C51.2 C52.2 C53.2 J1.1 J1.17 J7.8 J29.16 J29.41 J52.1 J70.2 J70.6 J70.10 J70.14 J71.2 J71.6 J71.10 J71.14 P1.1 P1.2 R15.2 R19.1 R20.1 R21.1 R22.1 R23.1 R24.1 R25.1 R26.1 R27.1 R28.1 R29.1 R30.1 R31.1 R32.1 R33.1 R34.1 R48.2 R50.2 R51.2 R52.2 R56.1 R57.1 RP1.5 RP1.7 RP2.5 RP2.7 RP3.1 U1.3 U2.5 U2.6 U3.28 U4.8 U5.8 U6.8 U7.8 U11.9 U11.24 U11.36 U11.48 U12.5 U13.3 U13.28 U20.4 U20.8 U20.13 U20.17 U20.20 | length 815.5
  Top Layer w0.254: J52.1@7.112,17.653 8.382,16.383 12.255,16.383 12.319,16.383 ; J1.17@7.112,66.04 8.382,67.31 11.43,67.31 ; 12.7,118.491 12.7,124.968 13.772,126.04 J71.2@14.698,126.04 ; U2.5@21.493,12.684 U2.6@21.493,13.184 21.493,14 22.225,14.732 v1(22.606,14.732) C42.2@23.876,14.732 ; C53.2@25.019,81.915 C52.2@26.67,81.915 C52.2@26.67,81.661 ; v1(25.4,92.202) R52.2@25.4,93.726 25.4,94.488 R51.2@25.4,95.377 ; v1(26.543,80.518) 26.67,80.645 C52.2@26.67,81.661 ; R48.2@26.67,42.164 R57.1@26.67,39.497 39.243,39.497 40.259,40.513 40.259,49.022 ; U13.28@27.394,86.388 26.698,86.388 26.416,86.106 26.416,85.344 27.305,84.455 27.686,84.455 ; U13.3@28.706,85.776 28.706,84.84 28.321,84.455 27.686,84.455 ; U12.5@31.41,47.259 31.41,49.022 ; 32.385,109.474 32.512,109.347 R26.1@34.671,109.347 ; 32.385,112.903 R25.1@34.671,112.903 ; 32.385,116.459 R24.1@34.671,116.459 ; v1(33.02,80.899) C51.2@33.02,81.915 ; v1(33.02,91.186) C35.2@34.798,91.186 34.798,90.424 35.052,90.17 36.957,90.17 37.211,89.916 U11.36@37.64,89.916 ; v1(33.02,93.091) 34.036,94.107 v1(44.704,94.107) ; U11.48@36.14,82.916 36.14,82.876 35.179,81.915 C51.2@33.02,81.915 ; U11.9@41.64,81.416 41.64,79.772 42.799,78.613 47.244,78.613 C50.2@47.752,79.121 v1(48.641,79.121) ; U11.24@44.64,88.416 44.64,90.995 C49.2@44.831,91.186 ; C49.2@44.704,91.313 v1(44.704,92.583) ; C45.1@58.801,43.974 RP1.5@58.801,46.431 ; RP1.7@58.801,48.158 60.3,48.158 61.087,47.371 61.087,46.863 61.468,46.482 U20.4@62.738,46.482 64.77,46.482 v1(65.151,46.101) ; C43.1@66.167,59.563 v1(68.416,57.314) U3.28@71.12,57.314 ; v1(71.12,46.101) 71.501,46.482 U20.17@73.406,46.482 75.565,46.482 ; v1(71.501,41.402) U20.13@73.406,41.402 74.549,41.402 75.438,40.513 RP2.7@76.708,40.513 ; U20.20@73.406,50.292 74.93,50.292 75.565,49.657 75.565,46.482 ; RP2.5@76.708,42.24 76.708,45.72 75.946,46.482 75.565,46.482 ; v1(84.582,57.314) 87.794,57.314 88.138,57.658 RP3.1@88.138,58.217 ; C52.2@26.67,81.661 26.924,81.915 27.877,81.915 ; 27.686,84.455 27.686,82.105 27.877,81.915 ; 27.877,81.915 R50.2@28.575,81.915 C51.2@33.02,81.915
  Top Layer w0.381: 12.255,18.796 v1(22.606,18.796) ; 12.954,15.494 R56.1@13.716,15.494 ; U1.3@60.929,117.692 60.929,118.841 61.468,119.38 70.993,119.38 74.549,122.936 85.923,122.936 J7.8@89.281,126.294
  Top Layer w0.61: J1.1@6.858,86.614 J1.1@7.112,86.36 7.112,88.011 7.874,88.773 8.255,88.773 ; R15.2@7.62,90.805 7.62,89.408 8.255,88.773 ; 12.954,15.494 12.255,16.192 12.255,16.383 12.255,18.796 12.255,20.511 16.51,24.765 16.51,29.972 11.43,35.052 11.43,49.022 ; R32.1@23.241,102.235 20.828,102.235 ; R31.1@23.241,105.791 20.828,105.791 ; R30.1@23.241,109.347 20.828,109.347 ; R29.1@23.241,112.903 20.828,112.903 ; R28.1@23.241,116.459 20.828,116.459 ; R27.1@23.241,120.142 22.479,120.142 20.828,118.491 ; v1(24.257,94.615) 24.384,94.488 25.4,94.488 ; 26.797,98.933 26.797,102.108 ; R22.1@28.829,102.108 26.797,102.108 ; R21.1@28.829,105.791 26.797,105.791 ; R20.1@28.829,109.347 26.797,109.347 ; R19.1@28.829,112.903 26.797,112.903 ; R34.1@28.829,116.459 26.797,116.459 ; R33.1@28.829,120.142 27.813,120.142 26.797,119.126 26.797,116.459 ; R23.1@34.671,120.142 33.02,120.142 32.385,119.507 32.385,116.459 32.385,112.903 32.385,109.474 32.385,99.695 31.496,98.806 v1(23.114,98.806) 21.844,98.806 20.828,99.822 20.828,102.235 ; U1.3@60.929,117.692 60.585,117.348 59.563,117.348 58.039,115.824 57.658,115.824 56.515,114.681 v2(56.515,108.204) 56.515,103.124 ; v1(61.849,58.928) C44.2@61.849,61.341 63.627,59.563 C43.1@66.167,59.563 ; U20.8@62.738,41.402 60.865,41.402 C45.1@58.547,43.72 56.166,43.72 C46.2@54.864,42.418 53.975,43.307 53.975,48.26 53.213,49.022 ; C7.2@78.74,99.441 80.01,99.441 80.518,98.933 U4.8@80.518,97.155 ; U5.8@80.391,89.027 78.232,89.027 ; U7.8@80.518,72.517 79.502,72.517 78.232,73.787 78.232,80.899 ; U6.8@80.518,80.899 78.232,80.899 ; 8.255,88.773 11.43,88.773 ; 11.43,49.022 31.41,49.022 40.259,49.022 53.213,49.022 ; 11.43,49.022 11.43,67.31 11.43,88.773 ; 11.43,88.773 11.43,117.221 12.7,118.491 14.097,119.888 19.431,119.888 20.828,118.491 ; 20.828,102.235 20.828,105.791 ; 20.828,105.791 20.828,109.347 ; 20.828,109.347 20.828,112.903 ; 20.828,112.903 20.828,116.459 ; 20.828,116.459 20.828,118.491 ; 26.797,102.108 26.797,105.791 ; 26.797,105.791 26.797,109.347 ; 26.797,109.347 26.797,112.903 ; 26.797,112.903 26.797,116.459 ; 53.213,49.022 56.515,52.324 v1(56.515,58.928) v1(56.515,77.724) v2(56.515,94.234) 56.515,103.124 ; 56.515,103.124 60.071,103.124 62.23,100.965 77.089,100.965 78.232,99.822 78.232,89.027 ; 78.232,80.899 C9.2@78.232,83.058 78.232,89.027
  Bottom Layer w0.254: J71.2@14.698,126.04 J71.2@14.849,126.191 ; J71.2@15,126.04 16.516,127.556 20.193,127.556 ; J71.6@20.08,126.04 20.08,127.443 20.193,127.556 ; J71.10@25.16,126.04 25.16,127.542 25.146,127.556 ; v1(25.4,92.202) 25.4,89.281 26.543,88.138 v1(26.543,80.518) ; J71.14@30.24,126.04 30.24,127.542 30.226,127.556 ; v1(33.02,80.899) v1(33.02,91.186) v1(33.02,93.091) ; J70.2@37.5,126.04 37.5,127.52 37.465,127.556 ; J70.6@42.58,126.04 42.58,127.464 42.672,127.556 ; v1(44.704,92.583) v1(44.704,94.107) ; J70.10@47.66,126.04 47.66,127.464 47.752,127.556 ; v1(48.641,79.121) 50.038,77.724 v1(56.515,77.724) ; J70.14@52.74,126.04 52.74,127.52 52.705,127.556 ; J29.16@53.467,94.234 v2(56.515,94.234) ; P1.1@60,123.5 P1.2@60,126.04 60,127.484 60.071,127.556 ; v1(68.416,57.314) v1(84.582,57.314) ; v1(71.12,46.101) v1(65.151,46.101) 63.5,46.101 v1(59.817,42.418) 70.485,42.418 v1(71.501,41.402) ; J7.8@89.154,126.167 J7.8@89.281,126.04 ; J7.8@89.281,126.294 88.019,127.556 60.071,127.556 ; 20.193,127.556 25.146,127.556 ; 25.146,127.556 30.226,127.556 ; 30.226,127.556 37.465,127.556 ; 37.465,127.556 42.672,127.556 ; 42.672,127.556 47.752,127.556 ; 47.752,127.556 52.705,127.556 ; 52.705,127.556 60.071,127.556
  Bottom Layer w0.381: v1(22.606,14.732) v1(22.606,18.796) ; J29.41@50.927,61.214 52.197,59.944 55.499,59.944 v1(56.515,58.928)
  Bottom Layer w0.61: v1(23.114,98.806) 23.114,95.758 v1(24.257,94.615) ; v1(56.515,58.928) v1(61.849,58.928)
+5V: C40.1 C41.2 D1.2 J1.2 J1.4 J28.2 J29.42 J51.1 K1.2 R6.1 U2.7 U10.2 U14.A4 U14.A9 U14.B4 U14.B9 | length 247.7
  Top Layer w0.254: J51.1@7.112,20.193 8.382,18.923 10.541,18.923 11.176,19.558 11.176,20.828 v1(12.319,21.971) v1(13.716,23.368) ; v1(16.383,8.255) v1@16.5,8.138 ; U14.A4@16.5,6.792 v1@16.5,8.138 ; U2.7@20.518,13.934 20.518,14.803 21.463,15.748 27.051,15.748 ; U14.A9@21.6,6.792 U14.B4@21.3,6.792 21.3,5.806 20.32,4.826 17.78,4.826 16.8,5.806 U14.B9@16.8,6.792 16.8,7.838 v1@16.5,8.138 ; v1(31.115,37.846) v1(33.528,37.846) ; 49.784,59.944 52.197,59.944 J29.42@53.467,61.214
  Top Layer w0.381: C40.1@6.985,10.795 6.985,8.763 v1(7.493,8.255) C41.2@8.763,6.985 ; v1(16.383,17.907) 17.78,17.907 ; R6.1@17.78,16.764 17.78,17.907 ; U10.2@26.457,12.842 27.051,13.436 27.051,15.748 24.892,17.907 17.78,17.907
  Top Layer w0.508: J1.4@9.652,83.82 J1.2@9.652,86.36 ; J28.2@17.907,112.014 16.637,110.744 13.843,110.744 13.462,110.363 v1(13.462,86.36) 13.462,52.324 14.478,51.308 v1(34.036,51.308) 41.148,51.308 49.784,59.944 ; D1.2@48.514,41.529 48.514,43.434 K1.2@49.276,44.196
  Bottom Layer w0.254: v1(13.716,23.368) 13.767,23.419 20.117,23.419 31.115,34.417 v1(31.115,37.846)
  Bottom Layer w0.381: v1(7.493,8.255) v1(16.383,8.255) 17.272,9.144 17.272,15.24 16.383,16.129 v1(16.383,17.907) v1(12.319,21.971)
  Bottom Layer w0.508: J1.2@9.652,86.36 v1(13.462,86.36) ; v1(33.528,37.846) 33.528,40.513 35.56,42.545 ; v1(34.036,51.308) 34.036,47.498 35.56,45.974 35.56,42.545 ; K1.2@49.276,44.196 47.625,42.545 35.56,42.545
+24V: C36.1 C37.1 C38.1 C39.1 J3.1 U22.7 U23.7 U24.7 U25.7 | length 13.2
  Top Layer w0.762: 30.099,28.128 30.099,26.924 31.369,25.654 U25.7@31.369,23.176 ; U24.7@45.339,23.176 45.339,28.128 ; U23.7@59.309,23.114 59.309,25.908
  other v1: 53.975,19.05 55.118,19.05 56.261,19.05 57.404,19.05 58.547,19.05 68.326,19.05 69.469,19.05 70.612,19.05 71.755,19.05 72.898,19.05 29.718,19.177 31.115,19.177 40.132,19.304 41.275,19.304 42.418,19.304 43.561,19.304 44.577,19.304 40.132,20.447 41.275,20.447 42.418,20.447 43.561,20.447 44.577,20.447 53.975,20.447 55.118,20.447 56.261,20.447 57.404,20.447 58.547,20.447 68.326,20.447 69.469,20.447 70.612,20.447 71.755,20.447 72.898,20.447 29.718,20.574 31.115,20.574 29.718,21.844 29.718,22.987 29.718,24.257
-0.75V: JP10.3 R3.2 U8.1 | length 28.1
  Top Layer w0.381: R3.2@80.137,116.713 v1(81.534,116.713) U8.1@83.185,116.713
  Bottom Layer w0.254: v1(81.534,116.713) 94.742,103.505 94.742,98.933 JP10.3@96.012,97.663
-1.2V: C6.2 C48.2 JP10.1 R69.2 U8.4 U9.5 | length 56.5
  Top Layer w0.381: R69.2@78.613,114.173 78.613,111.379 80.01,109.982 80.01,109.728 C6.2@80.01,109.093 ; U8.4@83.185,112.903 84.455,112.903 85.598,114.046 85.598,118.364 C48.2@84.963,118.999
  Top Layer w0.61: U9.5@63.754,108.839 66.04,108.839 67.945,110.744 77.597,110.744 C6.2@80.01,108.331 ; C6.2@80.01,109.093 C6.2@80.01,108.331 ; C6.2@80.01,109.728 U8.4@83.185,112.903 ; v1(81.788,108.331) C6.2@80.01,108.331
  Bottom Layer w0.254: v1(81.788,108.331) 87.122,102.997 90.805,102.997 92.202,101.6 92.202,98.933 JP10.1@90.932,97.663
-VREF: J60.2 J60.4 J60.6 J60.8 J60.10 J60.12 J60.14 J60.16 JP10.2 | length 22.6
  Top Layer w0.762: JP10.2@93.472,97.663 93.472,96.52 96.012,93.98 J60.2@96.012,93.853 J60.4@96.012,91.313 J60.6@96.012,88.773 J60.8@96.012,86.233 J60.10@96.012,83.693 J60.12@96.012,81.153 J60.14@96.012,78.613 J60.16@96.012,76.073
BEC: J30.3 J30.4 J41.3 J41.4 J50.1 K1.3 | length 133.3
  Top Layer w0.254: J50.1@7.112,22.733 8.382,21.463 10.414,21.463 13.843,24.892 v1(13.843,26.543) ; v1(30.353,38.862) 39.497,38.862 41.656,41.021 K1.3@41.656,44.196 44.831,44.196 v1(46.355,45.72) ; v1(54.991,45.72) 54.991,49.657 57.531,52.197 v1(57.531,54.356) ; v1(84.963,54.356) v1(90.043,54.356)
  Top Layer w0.762: J41.4@93.472,61.976 92.329,61.976 91.44,62.865 91.44,69.088 92.71,70.358 J30.4@93.472,70.358 J30.3@96.012,70.358
  Bottom Layer w0.254: v1(13.843,26.543) 19.304,26.543 30.353,37.592 v1(30.353,38.862) ; v1(46.355,45.72) v1(54.991,45.72) ; v1(57.531,54.356) v1(84.963,54.356) ; v1(90.043,54.356) 90.043,60.579 91.44,61.976 92.456,61.976
  Bottom Layer w0.762: 92.456,61.976 J41.4@93.472,61.976 J41.3@96.012,61.976 ; J30.4@93.472,70.358 J30.3@96.012,70.358
BNO_BOOTN: J28.41 R50.1 U13.4 | length 45.6
  Top Layer w0.254: J28.41@15.367,61.214 16.637,62.484 19.304,62.484 24.003,57.785 v1(29.591,57.785) ; R50.1@28.829,83.439 28.829,83.693 v1(29.206,84.07) U13.4@29.206,85.776
  Bottom Layer w0.254: v1(29.206,84.07) 29.206,70.616 29.591,70.231 v1(29.591,57.785)
BNO_INT: J29.30 U13.14 | length 44.3
  Top Layer w0.254: U13.14@30.518,89.888 v1(31.595,89.888) ; v1(33.02,70.739) 46.609,70.739 47.625,71.755 47.625,72.898 49.911,75.184 52.197,75.184 J29.30@53.467,76.454
  Bottom Layer w0.254: v1(31.595,89.888) 32.258,89.225 32.258,71.501 v1(33.02,70.739)